# EAGLE board mod_mixer_v0.3b (EAGLE 7.2.0)
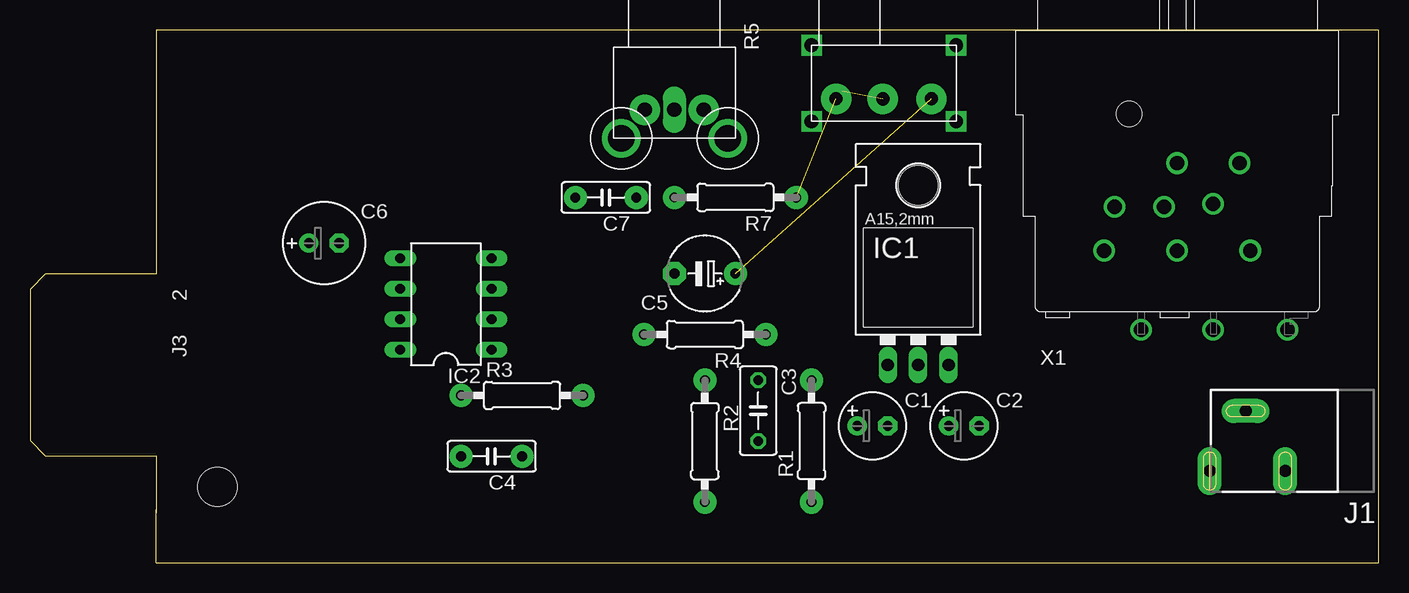
[diagram p0: board, top side]
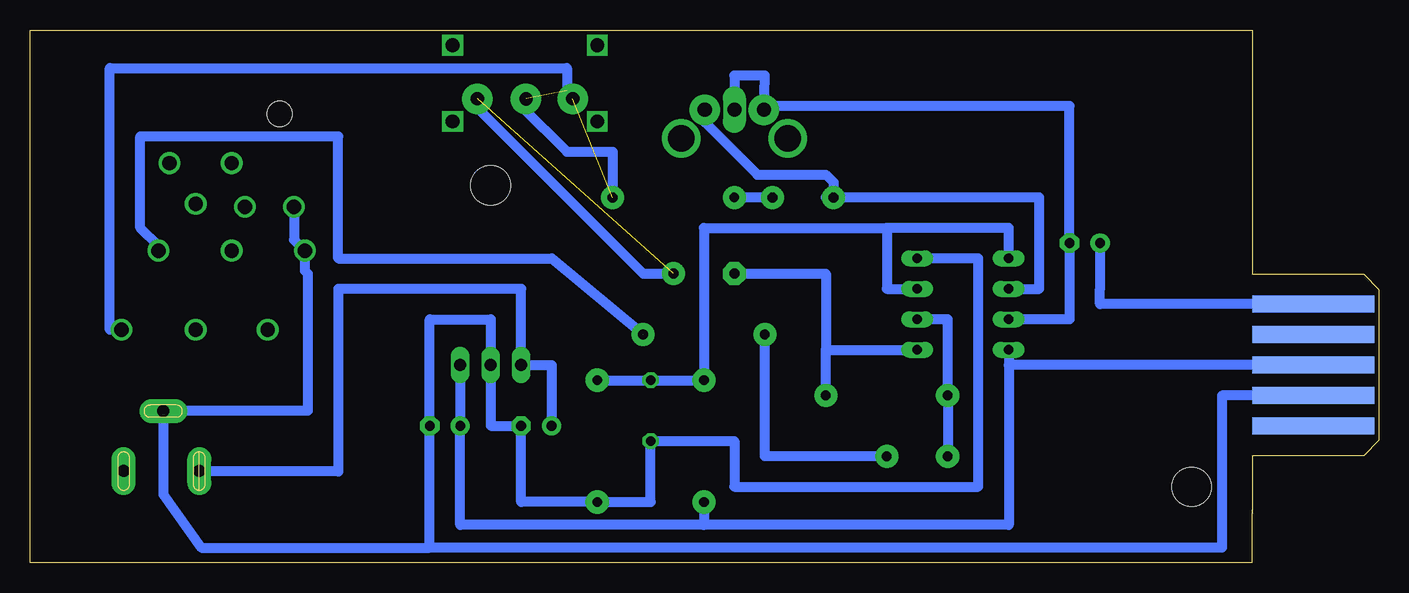
[diagram p1: board, bottom side, seen from below]

Size 112.45 x 44.45 mm. Coordinates in mm from the lower left corner, seen from the top.
Outline: 10.54,44.44 112.45,44.44 112.45,0 10.54,0 10.54,4.45
Outline: 10.54,44.45 10.54,27.3
Copper layers (1*16): Top 0.035mm / dielectric 1.5mm / Bottom 0.035mm
Design rules "default": minimum track width 10mil, minimum drill 24mil, track to track 8mil, track to pad 8mil, pad to pad 8mil, via to via 8mil, smd to smd 8mil, copper to edge 40mil, drill to drill 8mil, minimum pad ring 10mil, minimum via ring 8mil, stop-mask expansion 4mil, vias tented up to drill 0mil, thermal gap 10mil
Holes 3.26 mm at 15.62,6.35

## Footprints (pad centres in the part's own frame; a part is rotated, then mirrored left to right if it is on the bottom)
E2,5-6 = drill 0.813 pad 1.6: + -1.27,0 | drill 0.813 pad 1.6 octagon: - 1.27,0
C050-030X075 = drill 0.813 octagon: 1 -2.54,0; 2 2.54,0
C5B2.5 = drill 0.813 pad 1.93: 1 -2.54,0; 2 2.54,0
E5-6 = drill 0.813 pad 1.905: + -2.54,0 | drill 0.813 pad 1.905 octagon: - 2.54,0
E2,5-7 = drill 0.813 pad 1.6: + -1.27,0 | drill 0.813 pad 1.6 octagon: - 1.27,0
78XXL = drill 1.016 long: GND 0,-3.81; IN -2.54,-3.81; OUT 2.54,-3.81 | hole 3.302: 0,11.176
DIL08 = drill 0.813 pad 1.27 long: 1 -3.81,-3.81; 2 -1.27,-3.81; 3 1.27,-3.81; 4 3.81,-3.81; 5 3.81,3.81; 6 1.27,3.81; 7 -1.27,3.81; 8 -3.81,3.81
POWER_JACK_SLOT = drill 1 pad 2 long: GND@1 2.58,7.5; GND@2 7.58,10.8; PWR 2.58,13.8
CARDEDGE-50 = smd 1.397 x 10.16 bottom: 1 -30.48,5.08; 3 -27.94,5.08; 5 -25.4,5.08; 7 -22.86,5.08; 9 -20.32,5.08
0207/10 = drill 0.813 pad 1.93: 1 -5.08,0 | drill 0.8 pad 1.93: 2 5.08,0
PC16S = drill 1.2 pad 2.54: 1A 5,-7.77; 1E 0.08,-7.77 | drill 1.2 pad 1.93 long: 1S 2.54,-7.77 | drill 2.2 pad 3.175: P$1 6.985,-10.16; P$2 -1.905,-10.16
255SB = drill 1.1 pad 2.54: 1 3.01,-0.658; 2 -1.033,-0.663; 3 -4.939,-0.66 | drill 1.143 square: P$1 5.08,-2.54; P$2 -6.985,-2.54; P$5 5.08,3.81; P$6 -6.985,3.81
NCJ10FI-H-0 = drill 1.2: 1 -6.1,-18.4; 2 6.1,-18.4; 3 0,-18.4; G 0,-11.1; GN -1.1,-14.75; R -5.2,-14.75; RS -3,-25; S 5.2,-11.1; SS 3,-14.5; T 9.2,-25; TS 3,-25 | hole 2.1: -4,-7

## Placement (x,y rotation side)
C1  0.33uf  [E2,5-6]  70.23,11.43 0 top
C2  1.0 uf  [E2,5-6]  77.85,11.43 0 top
C3  4.7 uF  [C050-030X075]  60.71,12.7 270 top
C4  0.1 uF  [C5B2.5]  38.48,8.89 180 top
C5  10uF  [E5-6]  56.26,24.13 180 top
C6  10uF  [E2,5-7]  24.51,26.67 0 top
C7  0.1 uF  [C5B2.5]  48.01,30.48 180 top
IC1  [78XXL]  74.04,20.32 0 top
IC2  TL082P  [DIL08]  34.67,21.59 90 top
J1  POWER_JACKSLT  [POWER_JACK_SLOT]  112.14,5.08 90 top
J3  CON-50-EDGE  [CARDEDGE-50]  0.38,-8.89 270 top
R1  100k  [0207/10]  65.15,10.16 90 top
R2  100k  [0207/10]  56.26,10.16 270 top
R3  1M  [0207/10]  41.02,13.97 0 top
R4  10k  [0207/10]  56.26,19.05 180 top
R5  PC16S  [PC16S]  51.18,45.57 0 top
R7  10k  [0207/10]  58.8,30.48 180 top
S1  [255SB]  72.14,39.37 0 top
X1  NCJ10FI-H-0  [NCJ10FI-H-0]  95.63,44.45 0 top

## Library data of the parts
C1 C2 C5 C6 = rcl
C3 R1-R4 R7 = resistor
C4 C7 = capacitor-wima
IC1 J1 = SparkFun
IC2 = linear; DATA_SHEET: <a href="http://www.ti.com/lit/ds/symlink/tl084a.pdf"> Data sheet </a>
J3 = card-edge_5pin_b
R5 = piherUPDATE; OC_FARNELL: 4452940; OC_NEWARK: unknown
S1 = switchUPDATE
X1 = con-neutrik_ag; MPN: NCJ10FI-H-0; OC_FARNELL: unknown; OC_NEWARK: 99B1398

## Nets
GND: C1.- C2.- C3.2 IC1.GND IC2.4 J1.GND@2 J3.7 R1.1 X1.1 X1.R
N$1: C3.1 IC2.3 IC2.5 R1.2 R2.1
N$2: C1.+ IC1.IN J1.PWR
N$3: C7.1 R7.2
N$4: C4.2 IC2.2 R3.1
N$5: C7.2 IC2.6 R5.1A
N$7: C5.- IC2.1 R3.2
N$8: C6.+ J3.1
N$9: S1.2 X1.T
N$10: R4.1 X1.2
N$11: C5.+ S1.1
N$13: C4.1 R4.2
N$14: R7.1 S1.3
N$15: C6.- IC2.7 R5.1E R5.1S
VCC: C2.+ IC1.OUT IC2.8 J3.5 R2.2

## Tracks (layer width: path | path; a pad name or v marks a point on that pad's centre or on a via)
GND
  Bottom 0.813: X1.R 90.43,26.95 X1.1 89.53,24.38 89.28,24.13 89.28,12.7 101.3,12.7 J1.GND@2 101.34,5.71 98.17,1.27 79.12,1.27 | 79.12,1.27 C2.- 79.12,20.32 74.04,20.32 IC1.GND 74.04,11.43 C1.- 71.5,5.08 R1.1 60.71,5.08 C3.2 53.72,10.16 53.72,6.35 33.4,6.35 33.4,25.4 IC2.4 | 79.12,1.27 13.08,1.27 13.08,12.7 13.08,13.97 J3.7
N$1
  Bottom 0.813: R1.2 C3.1 R2.1 56.26,27.94 41.02,27.94 | IC2.5 30.86,27.94 41.02,27.94 | IC2.3 41.02,22.86 41.02,27.94
N$2
  Bottom 0.813: J1.PWR 98.34,7.62 86.74,7.62 86.74,22.86 71.5,22.86 IC1.IN 68.96,16.51 C1.+
N$3
  Bottom 0.813: C7.1 R7.2
N$4
  Bottom 0.813: IC2.2 35.94,20.32 R3.1 C4.2
N$5
  Bottom 0.813: IC2.6 28.32,22.86 28.32,30.48 C7.2 | 46.1,30.48 C7.2 | R5.1A 56.18,36.75 51.82,32.38 46.1,32.38 45.47,31.75 C7.2
N$7
  Bottom 0.813: R3.2 46.1,17.78 | 46.1,17.78 IC2.1 | C5.- 46.1,24.13 46.1,17.78
N$8
  Bottom 0.813: C6.+ 23.24,22.86 23.24,21.59 J3.1
N$9  (1 unrouted)
  Bottom 0.813: X1.T 105.79,19.45 105.79,41.27 67.69,41.27 67.69,39.37
N$10  (1 unrouted)
  Bottom 0.813: X1.2 101.73,26.42 103.25,27.94 103.25,35.56 86.74,35.56 86.74,25.4 68.96,25.4 R4.1
N$11  (1 unrouted)
  Bottom 0.813: 75.31,38.1 61.34,24.13 C5.+
N$13
  Bottom 0.813: C4.1 51.18,8.89 R4.2
N$14  (1 unrouted)
  Bottom 0.813: 71.5,38.1 67.69,34.29 63.88,34.29 R7.1
N$15
  Bottom 0.813: R5.1S 53.72,40.64 51.18,40.64 51.18,40.57 R5.1E 51.26,38.1 25.78,38.1 C6.- 25.78,20.32 IC2.7
VCC
  Bottom 0.813: IC1.OUT C2.+ 76.58,3.17 56.26,3.17 | IC2.8 30.86,16.51 | 30.86,16.51 30.86,3.17 56.26,3.17 | R2.2 56.26,3.17 | J3.5 30.86,16.51